# EAGLE board E93_Piko_51290_Lichtplatine_J1_012_02_02 (EAGLE 5.10)
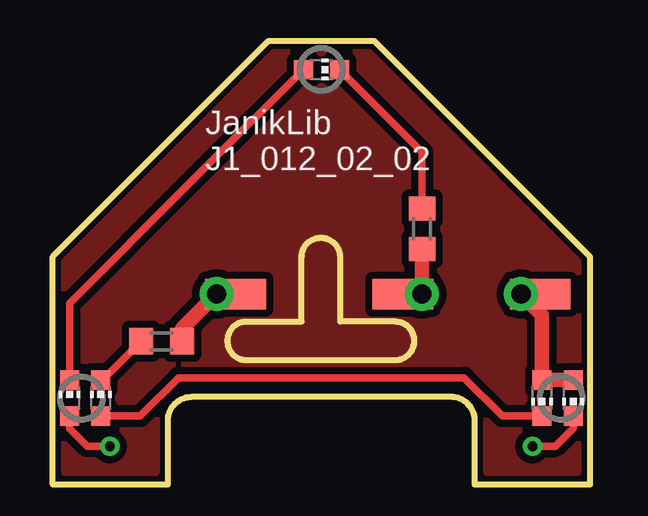
[diagram p0: board, top side]
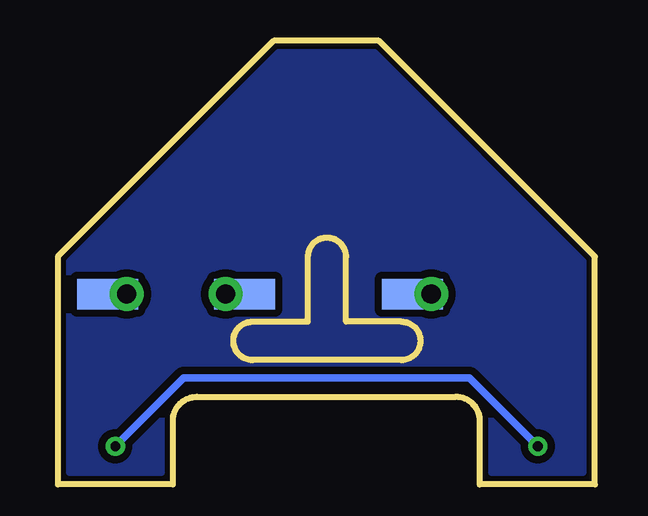
[diagram p1: board, bottom side, seen from below]

No outline drawn. Coordinates in mm, seen from the top.
Copper layers (1*16): Top 0.035mm / dielectric 1.5mm / Bottom 0.035mm
Design rules "default *": minimum track width 7mil, minimum drill 0.6mm, track to track 8mil, track to pad 8mil, pad to pad 8mil, via to via 8mil, smd to smd 8mil, copper to edge 40mil, drill to drill 8mil, minimum pad ring 10mil, minimum via ring 8mil, stop-mask expansion 4mil, vias tented up to drill 0mil, thermal gap 10mil
tKeepout: area 0,9.5 to 4.5,14; area 17.9,9.5 to 22.4,14
bKeepout: area 1,9 to 21.4,18.5; area 0,0 to 22.4,6.8
Milling: 23 lines

## Footprints (pad centres in the part's own frame; a part is rotated, then mirrored left to right if it is on the bottom)
CHIP-LED0603 = smd 0.8 x 0.8: A 0,-0.75; C 0,0.75
SMD1,27-2,54 = smd 1.27 x 2.54: 1 0,0
R0603 = smd 1 x 1.1: 1 -0.85,0; 2 0.85,0

## Placement (x,y rotation side)
AB1  [CHIP-LED0603]  0.7,3.6 0 top
AB2  [CHIP-LED0603]  21.7,3.6 180 top
AB3  [CHIP-LED0603]  11.2,17.3 270 top
HI  [SMD1,27-2,54]  7.62,7.94 270 bottom
HI1  [SMD1,27-2,54]  7.62,7.94 90 top
PLUS  [SMD1,27-2,54]  20.32,7.94 90 bottom
PLUS1  [SMD1,27-2,54]  20.32,7.94 90 top
R2  6k8  [R0603]  4.54,5.97 0 top
R5  3k6  [R0603]  15.4,10.66 270 top
RU1  [CHIP-LED0603]  2,3.6 0 top
RU2  [CHIP-LED0603]  20.4,3.6 180 top
VO  [SMD1,27-2,54]  14.61,7.94 90 bottom
VO1  [SMD1,27-2,54]  14.61,7.94 90 top

## Library data of the parts
AB1-AB3 RU1 RU2 = led
HI HI1 PLUS PLUS1 VO VO1 = wirepad
R2 R5 = rcl

## Nets
N$1: AB1.C AB3.A
N$2: AB3.C R5.1
N$3: R5.2 VO1.1 VO.1
N$4: AB1.A AB2.C
N$6: RU1.A RU2.C
N$7: R2.1 RU1.C
N$10: AB2.A PLUS1.1 PLUS.1 RU2.A
N$13: HI1.1 HI.1 R2.2

## Tracks (layer width: path | path; a pad name or v marks a point on that pad's centre or on a via)
N$1
  Top 0.305: AB3.A 6.42,13.27 5.71,12.56 0.7,7.55 AB1.C
N$2
  Top 0.305: R5.1 15.4,13.85 AB3.C
N$3  (via drill 0.8 pad 1.42)
  Top 0.61: v15.4,7.94 R5.2 | v15.4,7.94 VO.1 | v15.4,7.94 | v15.4,7.94 VO.1 | VO.1
  Bottom 0.61: VO.1 v15.4,7.94 | v15.4,7.94
N$4  (via drill 0.4)
  Top 0.305: AB1.A 0.7,2.32 1.43,1.59 v2.38,1.59 | AB2.C 21.7,2.33 20.95,1.59 v20,1.59
  Bottom 0.305: v2.38,1.59 5.24,4.45 17.14,4.45 v20,1.59
N$6
  Top 0.305: RU1.A 3.64,2.85 5.24,4.45 17.14,4.45 18.74,2.85 RU2.C
N$7
  Top 0.305: RU1.C 2.07,4.35 R2.1
N$9
  pour Top (isolate 0.305): 0.5,0.5 0.5,9.3 9.2,18 13.2,18 14.8,16.4 21.9,9.3 21.9,0.5 18.1,0.5 18.1,2.6 arc90 16.55,4.15 5.8,4.15 arc90 4.3,2.65 4.3,0.5
  pour Bottom (isolate 0.305): 0.5,0.5 0.5,9.3 9.2,18 13.2,18 14.8,16.4 21.9,9.3 21.9,0.5 18.1,0.5 18.1,2.6 arc90 16.55,4.15 5.8,4.15 arc90 4.3,2.65 4.3,0.5
N$10  (via drill 0.8 pad 1.42)
  Top 0.61: AB2.A RU2.A 20.4,7.06 v19.53,7.94 PLUS1.1
  Bottom 0.61: v19.53,7.94 PLUS1.1
N$13  (via drill 0.8 pad 1.42)
  Top 0.61: R2.2 5.39,6.5 v6.83,7.94 | v6.83,7.94 HI1.1 | v6.83,7.94
  Bottom 0.61: v6.83,7.94 HI1.1

## Text on the board
tNames: JanikLib | J1_012_02_02
tStop: E93 LED | H | V | +
bStop: design by Janik Merz | E93 LED | Für Piko 51290 | H | V | +